# Altium PCB Modified_Dub_Siren.PcbDoc
Units mil, origin at the board's own origin, x right, y up, seen from the top; angles counter-clockwise.
Board outline 4500 x 2600 mil, 2 copper layers (Top Layer, Bottom Layer), stack 60.4 mil thick; 44 components, 29 nets, 132 pads, 0 vias.
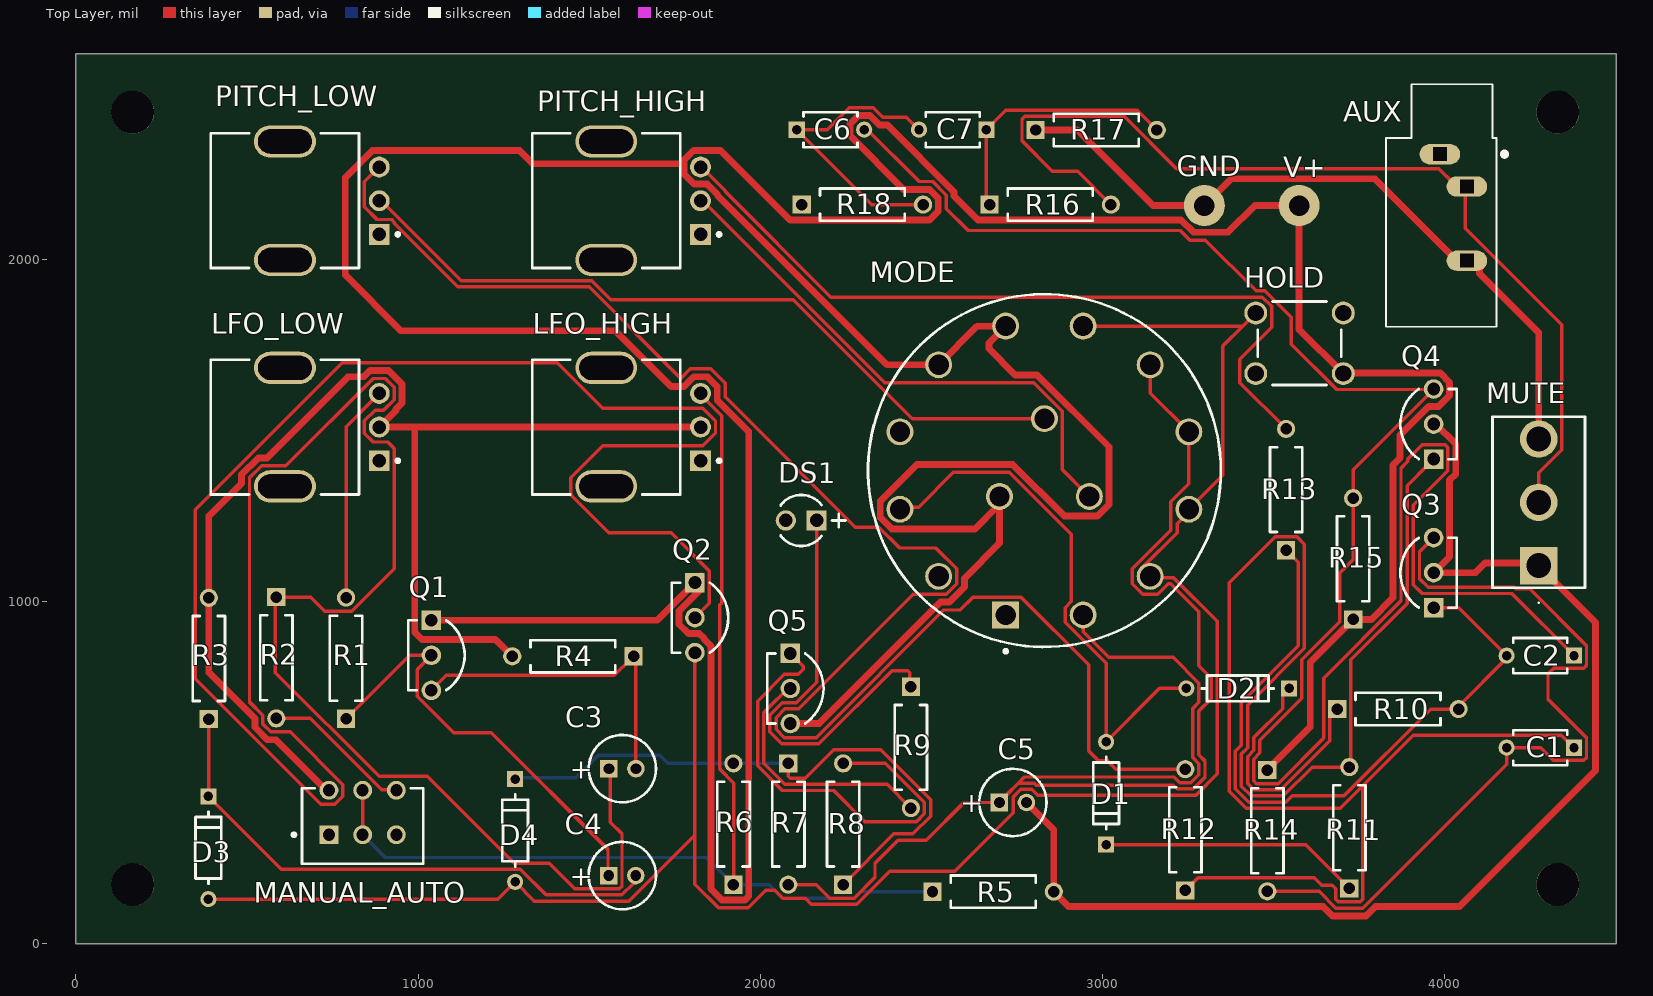
[diagram p0: Top Layer view]
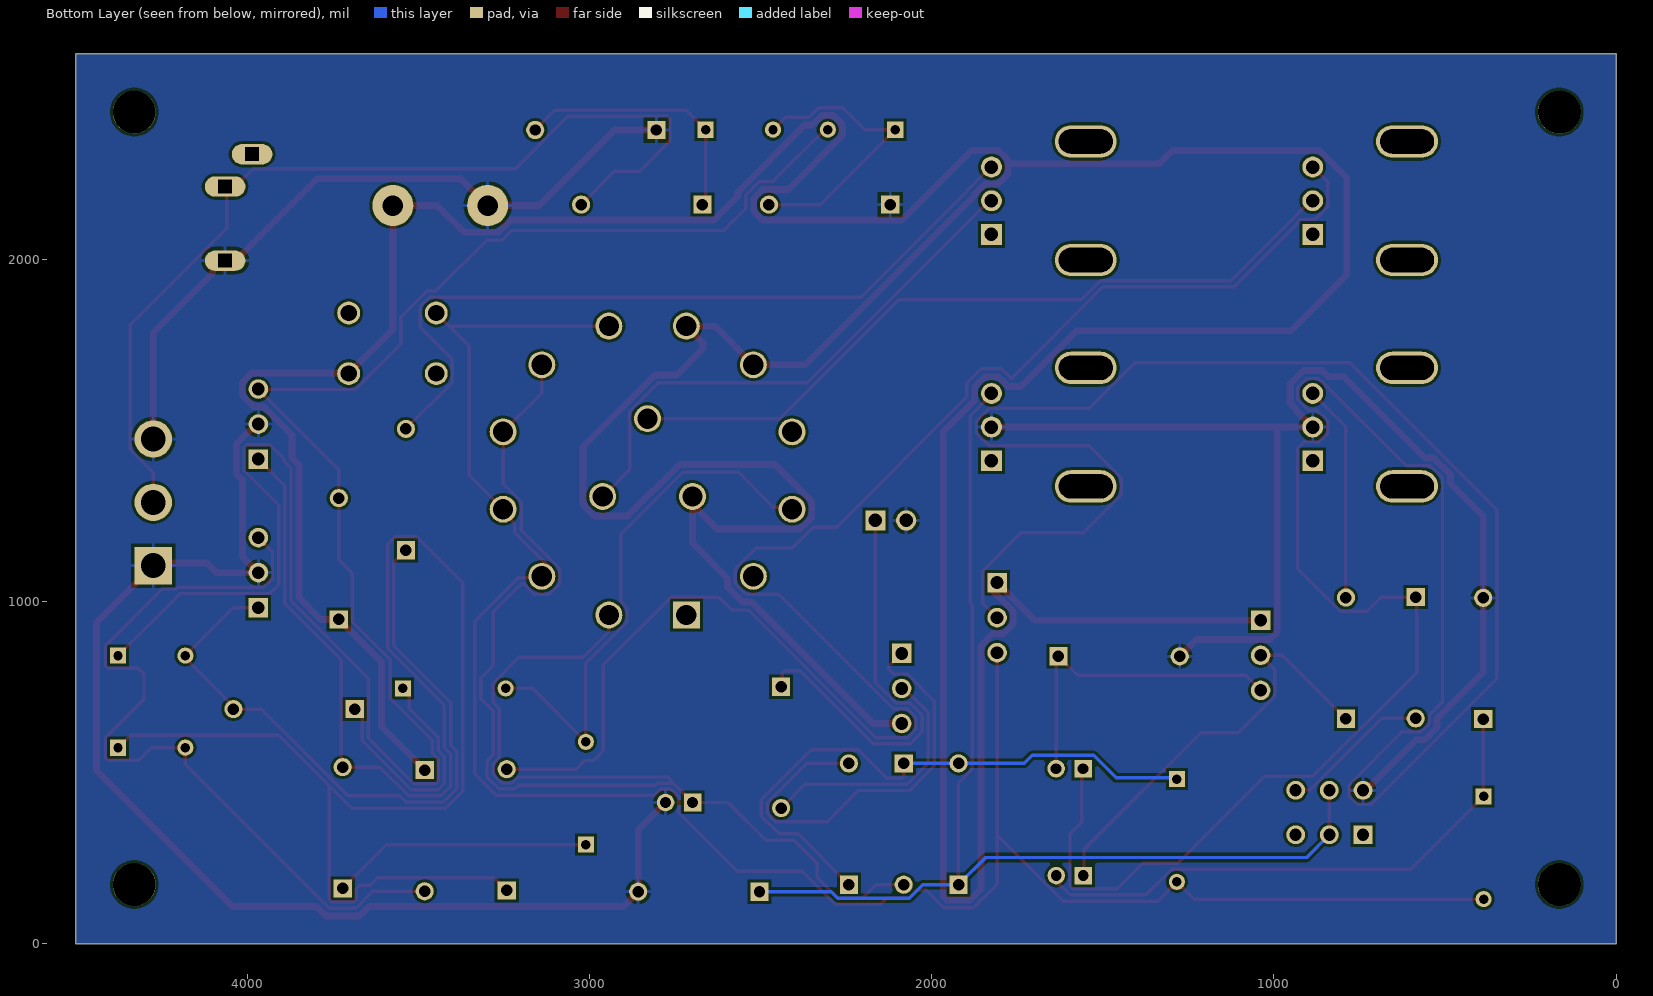
[diagram p1: Bottom Layer view, seen from below]

## Layer stack, top to bottom
Top Solder: solder mask 0.5, Solder Resist, Dk 3.3
Top Layer: signal copper 0.7
Dielectric1: core 59, FR-4, Dk 4.3
Bottom Layer: signal copper 0.7
Bottom Solder: solder mask 0.5, Solder Resist, Dk 3.3

## Board outline
0,0 4500,0 4500,2600 0,2600

## Design rules (kind name [scope] priority, off if disabled: settings)
Clearance [All] p1: gap=8 ignorepadtopadclearanceinfootprint=TRUE
DiffPairsRouting [All] p1: maxlimit=10 minlimit=10 mostfreqgap=10 toplayer_minwidth=10 toplayer_maxwidth=10 toplayer_prefwidth=10 bottomlayer_minwidth=10 bottomlayer_maxwidth=10 bottomlayer_prefwidth=10 maxuncoupledlength=500
HoleSize [All] p1: absolutevalues=TRUE maxlimit=300 minlimit=10 maxpercent=80.000 minpercent=20.000
MinimumAnnularRing [All] p1: minimumring=4
MinimumSolderMaskSliver [All] p1: minsoldermaskwidth=4
PasteMaskExpansion [All] p1: expansion=10
PlaneClearance [All] p1: clearance=15
PlaneConnect [All] p1: pad.planeconnectstyle=Relief pad.reliefexpansion=20 pad.reliefentries=4 pad.reliefconductorwidth=10 pad.reliefairgap=10 via.planeconnectstyle=Direct via.reliefexpansion=20 via.reliefentries=4 via.reliefconductorwidth=10 via.reliefairgap=10
PolygonConnect [All] p1: thpad.connectstyle=Relief thpad.reliefconductorwidth=10 thpad.reliefentries=4 thpad.polygonreliefangle="90 Angle" thpad.airgapwidth=10 smdpad.connectstyle=Relief smdpad.reliefconductorwidth=10 smdpad.reliefentries=4 smdpad.polygonreliefangle="90 Angle" smdpad.airgapwidth=10 via.connectstyle=Direct via.reliefconductorwidth=10 via.reliefentries=4 via.polygonreliefangle="90 Angle" via.airgapwidth=10
RoomDefinition Sheet1 [InComponentClass('Sheet1')] p1: confinementstyle=ConfineIn formatcopy=TRUE lockcomponents=FALSE outline 4545,-5 6251,-5 6251,680 4545,680
RoutingVias [All] p1: holewidth=10 width=20 viastyle="Through Hole" minholewidth=10 minwidth=20 maxholewidth=10 maxwidth=20
SMDNeckDown [All] p1: percent=100.000
SilkToSilkClearance [All] p1: silktosilkclearance=4
SilkToSolderMaskClearance SilkscreenOverComponentPads [IsPad] p1: minsilkscreentomaskgap=4 clearancetoexposedcopper=TRUE
SolderMaskExpansion [All] p1: expansion=10 istentingtop=FALSE
SupplyNets "Schematic Supply Nets_1" [InNet('V+')] p1: voltage=0.000
SupplyNets "Schematic Supply Nets" [InNet('GND')] p2: voltage=0.000
Width [All] p1: maxlimit=30 minlimit=10 preferedwidth=20
22 further rules are at their usual default settings.

## Components (designator, comment, footprint, x,y, rotation, side; value= is the part's Value field where it differs from the comment)
AUX "SJ1-3534" CUI_SJ1-3533 3985.29,2307.04 r270 top
C1 "10nF" FP-K15H5-MFG 4278.62,572.94 r180 top
C2 "10nF" FP-K15H5-MFG 4278.62,842.09 r180 top
C3 "ECA1HM100" CAPPR55-200-1100X500X1200 1596.63,511.73 r0 top value=10µF
C4 "ECA1HM100" CAPPR55-200-1100X500X1200 1596.31,199.3 r0 top value=10µF
C5 "ECA1HM100" CAPPR55-200-1100X500X1200 2737.65,412.84 r0 top value=100µF
C6 "100nF" FP-K15H5-MFG 2204.71,2378.66 r0 top
C7 "100nF" FP-K15H5-MFG 2561.71,2378.66 r180 top
D1 "1N4148" FP-017AG-MFG 3010,440 r90 top
D2 "1N4148" FP-017AG-MFG 3394.62,746.17 r180 top
D3 "1N4148" FP-017AG-MFG 387.04,280.57 r270 top
D4 "1N4148" FP-017AG-MFG 1283.15,331.24 r270 top
DS1 "3mm LED" LED-2P-2.28-3MM_A 2119.09,1236.84 r180 top
HOLD "SW3" BEST-TS-1109_V 3575.14,1754.57 r0 top
LFO_HIGH "PTV09A-4020F-B104" FP-PTV09A-4020-MFG 1549.49,1509.74 r90 top value=20kΩ
LFO_LOW "PTV09A-4020F-B104" FP-PTV09A-4020-MFG 610.72,1509.74 r90 top value=20kΩ
MANUAL_AUTO "JS202011CQN" FP-JS202011AQN-MFG 837.74,344.16 r0 top
MODE "SW2" CKCP-A30415RNZQ-15_V 2829.71,1382.77 r270 top
MUTE "X1" 100SP5T1B1M2QEH 4274.04,1104.83 r90 top
PITCH_HIGH "PTV09A-4020F-A104" FP-PTV09A-4020-MFG 1549.49,2171.14 r90 top value=20kΩ
PITCH_LOW "PTV09A-4020F-A104" FP-PTV09A-4020-MFG 610.72,2171.14 r90 top value=20kΩ
Q1 "2N3906" FP-135AR-MFG 1053.29,843 r0 top
Q2 "2N3906" FP-135AR-MFG 1823.56,952.92 r0 top
Q3 "2N3904" FP-135AR-MFG 3952.2,1084.31 r180 top
Q4 "2N3904" FP-135AR-MFG 3952.2,1518.55 r180 top
Q5 "2N3904" FP-135AR-MFG 2102.21,746.04 r0 top
R1 "MFR-25FBF52-10K" RESA60-630X240 789.18,834.55 r90 top value=10k
R2 "MFR-25FBF52-10K" RESA60-630X240 585.47,835.76 r270 top value=10k
R3 "MFR-25FBF52-1K" RESA60-630X240 388.1,833.65 r90 top value=1k
R4 "MFR-25FBF52-1K" RESA60-630X240 1452.03,839.98 r180 top value=1k
R5 "MFR-25FBF52-47K5" RESA60-630X240 2679.97,152.16 r0 top value=47.5k
R6 "MFR-25FBF52-2K21" RESA60-630X240 1921.08,349.87 r90 top value=2.21k
R7 "MFR-25FBF52-1K" RESA60-630X240 2081.34,349.87 r270 top value=1k
R8 "MFR-25FBF52-100K" RESA60-630X240 2241.59,349.87 r90 top value=100k
R9 "MFR-25FBF52-1K" RESA60-630X240 2439.55,573.73 r270 top value=1k
R10 "MFR-25FBF52-221K" RESA60-630X240 3862.76,685.88 r0 top value=221k
R11 "MFR-25FBF52-221K" RESA60-630X240 3720.66,339.11 r90 top value=221k
R12 "MFR-25FBF52-100K" RESA60-630X240 3241.35,332.99 r90 top value=100k
R13 "MFR-25FBF52-100K" RESA60-630X240 3535.84,1327.22 r90 top value=100k
R14 "MFR-25FBF52-4K75" RESA60-630X240 3481,330.55 r270 top value=4.75k
R15 "MFR-25FBF52-4K75" RESA60-630X240 3731.88,1124.96 r90 top value=4.75k
R16 "MFR-25FBF52-100K" RESA60-630X240 2846.77,2159.68 r0 top value=100k
R17 "MFR-25FBF52-22K1" RESA60-630X240 2980.98,2377.81 r0 top value=22k
R18 "MFR-25FBF52-22K1" RESA60-630X240 2297.92,2159.68 r0 top value=22k

## Footprints (in the part's own frame and the unit in brackets; to place one, negate y for a bottom-side part, rotate by r counter-clockwise, add the part's x,y. Pads: shape width x height; smd on the part's side, far side on the other; paste and mask are expansions set on the pad)
100SP5T1B1M2QEH [mm]
  rect 2.775x2.775 hole 1.85: 1(0,0)
  round 2.775 hole 1.85: 2(4.7,0) 3(9.4,0)
  silkscreen extent -2.8,-3.43 11.05,3.43
BEST-TS-1109_V [mm] "THD, 4-Leads, Body 6.2x6.2mm"
  round 1.7 hole 1.2: 1(-3.25,2.25) 2(3.25,2.25) 3(-3.25,-2.25) 4(3.25,-2.25)
  silkscreen extent -3.1,-3.1 3.1,3.1
CAPPR55-200-1100X500X1200 [mm] "THD, 2-Leads, Dia 5mm, Pin Spacing 2mm"
  rect 1.3x1.3 hole 0.8: 1(-1,0)
  round 1.3 hole 0.8: 2(1,0)
  silkscreen extent -2.5,-2.5 2.5,2.5, body extent -2.5,-2.5 2.45,2.5, height 12
CKCP-A30415RNZQ-15_V [mm] "Rotary Switch, A, 1-4, B, 5-8, C, 9-12 Terminals, Dia 26.19mm, Height 60.59mm"
  rect 2x2 hole 1.5: 1(10.722,-2.873)
  round 2 hole 1.5: 2(7.849,-7.849) 3(2.873,-10.722) 4(-2.873,-10.722) 5(-7.849,-7.849) 6(-10.722,-2.873) 7(-10.722,2.873) 8(-7.849,7.849) 9(-2.873,10.722) 10(2.873,10.722) 11(7.849,7.849) 12(10.722,2.873) A(1.925,-3.334) B(-3.85,0) C(1.925,3.334)
  silkscreen extent -13.09,-13.09 13.54,13.1, body extent -12.99,-13.07 13.09,13.07, height 60.58
CUI_SJ1-3533 [mm]
  oval 1.508x3.016 hole 1 square: 1(0,0) 2(2.4,2) 3(7.9,2)
  silkscreen extent -5.2,-4 12.8,4.97
FP-017AG-MFG [mm]
  rect 1.2x1.2 hole 0.7 paste-2539.97 mask+0: 1(-3.813,0)
  round 1.2 hole 0.7 paste-2539.97 mask+0: 2(3.813,0)
  silkscreen extent -2.68,-0.96 2.68,0.96, body extent -4.51,-1.05 4.51,1.05, height 0.25
FP-135AR-MFG [mm]
  rect 1.45x1.45 hole 0.95 paste-2539.97 mask+0: 1(-0.38,2.6)
  round 1.45 hole 0.95 paste-2539.97 mask+0: 2(-0.38,0) 3(-0.38,-2.6)
  silkscreen extent -2.1,-2.6 2.09,2.6, body extent -2.19,-3.42 2.19,3.42, height 0.25
FP-JS202011AQN-MFG [mm]
  rect 1.4x1.4 hole 0.9 paste-2539.97 mask+0: 1(-2.5,-0.65)
  round 1.4 hole 0.9 paste-2539.97 mask+0: 2(0,-0.65) 3(2.5,-0.65) 4(-2.5,2.65) 5(0,2.65) 6(2.5,2.65)
  silkscreen extent -5.22,-2.8 4.5,2.8, body extent -4.6,-2.9 4.6,3.45, height 0.25
FP-K15H5-MFG [mm]
  rect 1.2x1.2 hole 0.7 paste-2539.97 mask+0: 1(-2.5,0)
  round 1.2 hole 0.7 paste-2539.97 mask+0: 2(2.5,0)
  silkscreen extent -2,-1.3 2,1.3, body extent -3.2,-1.4 3.2,1.4, height 0.25
FP-PTV09A-4020-MFG [mm]
  rect 1.55x1.55 hole 1 paste-2539.97 mask+0: 1(-2.5,-7)
  round 1.55 hole 1 paste-2539.97 mask+0: 2(0,-7) 3(2.5,-7)
  rrect100% 2.4x4.6 hole 4 slot 1.8 at 0 deg paste-2539.97 mask+0: 4(-4.4,0) 5(4.4,0)
  silkscreen extent -5,-8.5 5,5.5, body extent -5.8,-7.88 5.8,5.6, height 0.25
LED-2P-2.28-3MM_A [mm] "LED, 2-Leads, Dia 3mm, Pitch 2.28mm"
  rect 1.5x1.5 hole 1: 1(-1.14,0)
  round 1.5 hole 1: 2(1.14,0)
  silkscreen extent -3.29,-1.9 1.52,1.9, body extent -1.9,-1.91 1.52,1.91, height 5.3
RESA60-630X240 [mm] "Axial Resistor, 2-Leads, Dia 2.4mm, Body Length 6.3mm"
  rect 1.35x1.35 hole 0.85: 1(-4.5,0)
  round 1.35 hole 0.85: 2(4.5,0)
  silkscreen extent -3.15,-1.2 3.15,1.2, body extent -4.77,-1.19 4.77,1.2, height 2.4

## Part data
AUX: "3.5 mm Right-Angle Stereo Jack, 4 Pin PCB Mount, Threaded w/ Nut", Package=None, Check_prices=https://www.snapeda.com/parts/SJ1-3534/Same+Sky/view-part/?ref=eda, MF="Same Sky", MP=SJ1-3534, SnapEDA_Link=https://www.snapeda.com/parts/SJ1-3534/Same+Sky/view-part/?ref=snap
C1 C2: library part CMP-02417-000048-1, "CAP CER 0.1UF 50V X7R RADIAL", Capacitance=100nF, Case/Package=Dipped, Dielectric=X7R, Max Operating Temperature=125°C, Min Operating Temperature=-55°C, Package Quantity=5000, Tolerance=10%, Voltage=50V, Construction=RADIAL, Depth=2.5mm, Diameter=500um, Height=4mm, Height - Seated (Max)=0.1inch, Lead Diameter=0.5mm, Lead Length=30mm, Lead Pitch=5mm, Lead/Base Style="Formed Leads", Length=4mm, Mount="Through Hole", Packaging=Bulk, Radiation Hardening=No, RoHS Compliant=Yes, Series=K, Termination=Radial, Thickness=2.6mm, Voltage Rating=50V, Voltage Rating (DC)=50V, Weight=0.005644oz, Width=2.5mm
C3 C4 C5: library part CMP-001-00025-7, "Aluminum Electrolytic Capacitor, 10 uF, +/- 20%, 50 V, -40 to 85 degC, 2-Pin THD, RoHS, Bulk", Capacitor Type=Electrolytic, Case/Package=Radial, Manufacturer=Panasonic, Max Operating Temperature=85°C, Min Operating Temperature=-40°C, Package Description="2-Pin Radial Lead, Dia 5 mm, Height 12 mm", Package Quantity=200, Package Reference=CAPPR55-200-1100X500X1200, Ripple Current=65mA, Tolerance=20%, Voltage Rating=50V, Datasheet URL=https://industrial.panasonic.com/cdbs/www-data/pdf/RDF0000/ABA0000C1218.pdf, Datasheet Version="Rev. 05, 10/2016", Diameter=5mm, Lead Pitch=2mm, Manufacturer URL=http://www.panasonic.com/, Mounting Technology=TH, Packaging=Bulk, Pins=2, Ripple Current (AC)=65mA, RoHS Compliant=True
C6 C7: library part CMP-02417-000048-1, "CAP CER 0.1UF 50V X7R RADIAL", Case/Package=Dipped, Dielectric=X7R, Max Operating Temperature=125°C, Min Operating Temperature=-55°C, Package Quantity=5000, Tolerance=10%, Voltage=50V, Capacitance=100nF, Construction=RADIAL, Depth=2.5mm, Diameter=500um, Height=4mm, Height - Seated (Max)=0.1inch, Lead Diameter=0.5mm, Lead Length=30mm, Lead Pitch=5mm, Lead/Base Style="Formed Leads", Length=4mm, Mount="Through Hole", Packaging=Bulk, Radiation Hardening=No, RoHS Compliant=Yes, Series=K, Termination=Radial, Thickness=2.6mm, Voltage Rating=50V, Voltage Rating (DC)=50V, Weight=0.005644oz, Width=2.5mm
D1 D2 D3 D4: library part CMP-07163-000046-1, "DIODE GEN PURP 100V 200MA DO35", Average Rectified Current=200mA, Capacitance=4pF, Case/Package=DO-35, Current=4A, Forward Current=300mA, Forward Voltage=1V, Max Forward Surge Current (Ifsm)=1A, Max Operating Temperature=175°C, Max Power Dissipation=500mW, Max Repetitive Reverse Voltage (Vrrm)=100V, Max Reverse Current=5uA, Min Operating Temperature=-65°C, Package Quantity=2000, Contact Plating=Tin, Current Rating=200mA, Diameter=1.91mm, Element Configuration=Single, Height=4.56mm, Lead Free="Lead Free", Length=4.56mm, Max Reverse Voltage (DC)=100V, Max Surge Current=4A, Mount="Through Hole", Number of Pins=2, Output Current=200mA, Outside Diameter=1.85mm, Packaging=Bulk, Peak Non-Repetitive Surge Current=4A, Polarity=Standard, Power Dissipation=500mW, Radiation Hardening=No, REACH SVHC="No SVHC", Recovery Time=4ns, Reverse Recovery Time=4ns, Reverse Voltage=100V, Series=-, Voltage=100V, Voltage Rating (DC)=100V, Weight=0.01lb, Width=1.91mm
DS1: library part CMP-007-00007-2, "Red LED, 80 mW, 30 mA, -25 to 85 degC, 2-Pin THD", Case/Package=304090041, Manufacturer="Shenzhen CGX", Package Description="2-Pin Through Hole Device, Dia 3 mm, Pitch 2.28 mm", Datasheet URL=http://datasheet.octopart.com/304090041-Chengguangxing-datasheet-62330656.pdf, Datasheet Version=Sep-14, Manufacturer URL=http://szcgx.com/, Mounting Technology=TH, Package Reference=304090041, RoHS Compliant=Unknown
HOLD: library part CMP-011-00002-2, "Tactile Switch, SPST, 12 V, 50 mA, -20 to 80 degC, 4-Pin THD", Case/Package=TS-1109, Manufacturer="Shenzhen Best", Package Description="4-Pin Through Hole Device, Body 6.2 x 6.2 mm", Datasheet URL=http://datasheet.octopart.com/TS-1109-Best-Inc.-datasheet-30458100.pdf, Datasheet Version=Dec-12, Manufacturer URL=www.best-dz.com/, Mounting Technology=TH, Package Reference=TS-1109, RoHS Compliant=Unknown
LFO_HIGH LFO_LOW PITCH_HIGH PITCH_LOW: library part CMP-07234-000017-1, "POT 20K OHM 1/20W CARBON LOG", Manufacturer="Bourns Inc.", Manufacturer Part Number=PTV09A-4020F-A203, Package=PTV09A-4020, Power Rating=0.05W, Resistance=20kΩ, Temperature="-10°C to +50°C", Temperature Range High=+50°C, Temperature Range Low=-10°C, Tolerance=20%, Voltage Rating=50V, Automotive=No, Category=Res, ComponentLink2Description=Datasheet, ComponentLink2URL=https://www.bourns.com/docs/product-datasheets/ptv09.pdf?sfvrsn=5e1089f1_12, Composition=Carbon, Device Class L1="Passive Components", Device Class L2=Resistors, Device Class L3="Variable Resistors and Potentiometers", Digikey Description="POT 20K OHM 1/20W CARBON LOG", Height=20.5mm, Lead Free=Yes, Mouser Description="Potentiometers 20K AUDIO 20%", Octopart=https://octopart.com/ptv09a-4020f-a203-bourns-1637636, RoHS=TRUE, Series=PTV09
MANUAL_AUTO: library part CMP-10038-000021-1, "SWITCH SLIDE DPDT 300MA 6V", Actuator Color=Black, Contact Current Rating=300mA, Contact Resistance=70mR, Max Operating Temperature=85°C, Max Voltage Rating (DC)=6V, Min Operating Temperature=-40°C, Package Quantity=1, Actuator Length=2mm, Actuator Material=Nylon, Actuator Type=Standard, Contact Material="Copper Alloy", Contact Plating=Silver, Current Rating=300mA, Depth=5.6mm, Electrical Life=5000Cycles, Housing Material=Nylon, Illumination Type=Non-Illuminated, Length=9mm, Max Current Rating=300mA, Mount="Through Hole", Orientation="Right Angle", Packaging=Bulk, Radiation Hardening=No, REACH SVHC="No SVHC", RoHS Compliant=Yes, Series=JS, Switch Function=On-On, Switch Travel=2mm, Termination="PC Pins", Throw Configuration=DPDT, Voltage Rating (DC)=6V
MODE: library part CMP-1076-00011-1, "A Series Rotary Switch, 3 Poles, 4 Positions, 30 deg Angle of Throw, -30 to 85 degC, RoHS", Manufacturer="C&K Components", PartNumber=A30415RNZQE, Temperature Range="-30 to 85 degC", Angle of Throw="30 deg", ComponentLink1Description="Manufacturer URL", ComponentLink1URL=http://www.ck-components.com/, ComponentLink2Description=Datasheet, ComponentLink2URL=http://www.ck-components.com/13397/arotary_9apr14.pdf/, ComponentLink3Description="Package Specification", ComponentLink3URL=http://www.ck-components.com/13397/arotary_9apr14.pdf/, DatasheetVersion=41821, Mounting Technology="Through Hole", PackageDescription="15-Pin Through Hole Device, Dia 26.19 mm, Height 60.59 mm", PackageReference=A30415RNZQ-15, Pole=3, Position=4, RoHS=TRUE, Series=A
MUTE: library part 100SP5T1B1M2QEH, "TOGGLE, 5A, 120VAC/28VDC SPDT, On-Off-(On) Panel Mount, Through Hole", Manufacturer_Name=E-Switch, Mouser Part Number=612-100-E1121, Datasheet Link=https://configured-product-images.s3.amazonaws.com/2D/specs/100SP5T1B1M2QEH.pdf, Geometry.Height=28.44mm, Manufacturer_Part_Number=100SP5T1B1M2QEH, Mouser Price/Stock=https://www.mouser.co.uk/ProductDetail/E-Switch/100SP5T1B1M2QEH?qs=7Bi7Dg8SEnz4%252B%252BHvW9Rm0A%3D%3D
Q1 Q2: library part CMP-00278-84408866-1, "2N3906TF Small Signal Bipolar Transistor, 0.2A I(C), 40V V(BR)CEO, 1-Element, PNP, Silicon, TO-92", Case/Package=TO-92, Collector Base Voltage (VCBO)=-40V, Collector Emitter Saturation Voltage=-400mV, Current Rating=-200mA, Emitter Base Voltage (VEBO)=-5V, Frequency=250MHz, Manufacturer Lifecycle Status=ACTIVE, Max Breakdown Voltage=160V, Max Junction Temperature (Tj)=150°C, Max Power Dissipation=625mW, Min Operating Temperature=-55°C, Collector Emitter Breakdown Voltage=-40V, Collector Emitter Voltage (VCEO)=-40V, Element Configuration=Single, Gain Bandwidth Product=250MHz, Height=5.33mm, hFE Min=100, Lead Free="Lead Free", Length=5.2mm, Lifecycle Status=Production, Max Collector Current=-200mA, Max Frequency=250MHz, Max Operating Temperature=150°C, Mount="Through Hole", NexarPartId=84408866, Number of Elements=1, Number of Pins=3, Packaging="Tape and Reel", Polarity=PNP, Power Dissipation=625mW, Radiation Hardening=No, REACH SVHC="No SVHC", RoHS=Compliant, Schedule B=8541210080, Transition Frequency=250MHz, Voltage Rating (DC)=-40V, Weight=240mg, Width=4.19mm
Q3 Q4 Q5: library part CMP-00278-84329632-1, "KSP10TA Transistor, bjt, npn, 25V V(Br)Ceo, to-92 Rohs Compliant: Yes", Case/Package=TO-92-3, Collector Base Voltage (VCBO)=30V, Collector Emitter Breakdown Voltage=25V, Collector Emitter Saturation Voltage=500mV, Current Rating=100mA, Emitter Base Voltage (VEBO)=3V, Frequency=650MHz, Manufacturer Lifecycle Status=ACTIVE, Max Collector Current=4mA, Max Frequency=100MHz, Max Junction Temperature (Tj)=150°C, Max Power Dissipation=350mW, Min Operating Temperature=-55°C, Collector Emitter Voltage (VCEO)=25V, Element Configuration=Single, Gain Bandwidth Product=650MHz, Height=8.77mm, hFE Min=60, Lead Free="Lead Free", Length=4.58mm, Lifecycle Status=Production, Max Breakdown Voltage=25V, Max Operating Temperature=150°C, Mount="Through Hole", NexarPartId=84329632, Number of Elements=1, Number of Pins=3, Polarity=NPN, Power Dissipation=350mW, Radiation Hardening=No, RoHS=Compliant, Transition Frequency=650MHz, Voltage Rating (DC)=25V, Weight=240mg, Width=3.86mm
R1 R2: library part CMP-009-00047-4, "Axial Resistor, 10 KOhm, +/- 1%, 0.25 W, -55 to 155 degC, 2-Pin THD, RoHS, Bulk", Case/Package=Axial, Manufacturer=Yageo, Max Operating Temperature=155°C, Min Operating Temperature=-55°C, Package Description="2-Pin Axial Lead, Dia 2.4 mm, Body Length 6.3 mm", Package Quantity=200, Package Reference=MFR-25, Power=250mW, Tolerance=1%, Voltage Rating=250V, Datasheet URL=http://www.yageo.com/documents/recent/Yageo%20LR_MFR_2013.pdf, Datasheet Version=Apr-13, Manufacturer URL=http://www.yageo.com/, Mounting Technology=TH, Packaging=Bulk, RoHS Compliant=True
R3 R4 R7 R9: library part CMP-009-00048-4, "Axial Resistor, 1 KOhm, +/- 1%, 250 mW, -55 to 155 degC, 2-Pin THD, RoHS, Bulk", Case/Package=Axial, Manufacturer=Yageo, Max Operating Temperature=155°C, Min Operating Temperature=-55°C, Package Description="2-Pin Axial Lead, Dia 2.4 mm, Body Length 6.3 mm", Package Quantity=200, Package Reference=MFR-25, Power=250mW, Tolerance=1%, Voltage Rating=250V, Composition=CarbonFilm, Datasheet URL=http://www.yageo.com/documents/recent/Yageo%20LR_MFR_2013.pdf, Datasheet Version=Apr-13, Manufacturer URL=http://www.yageo.com/, Mounting Technology=TH, Packaging=Bulk, RoHS Compliant=True
R5: library part CMP-009-00057-4, "Axial Resistor, 47.5 KOhm, +/- 1%, 0.25 W, -55 to 155 degC, 2-Pin THD, RoHS, Bulk", Case/Package=Axial, Manufacturer=Yageo, Max Operating Temperature=155°C, Min Operating Temperature=-55°C, Package Description="2-Pin Axial Lead, Dia 2.4 mm, Body Length 6.3 mm", Package Quantity=200, Package Reference=MFR-25, Power=250mW, Tolerance=1%, Voltage Rating=250V, Datasheet URL=http://www.yageo.com/documents/recent/Yageo%20LR_MFR_2013.pdf, Datasheet Version=Apr-13, Manufacturer URL=http://www.yageo.com/, Mounting Technology=TH, Packaging=Bulk, RoHS Compliant=True
R6: library part CMP-009-00054-4, "Axial Resistor, 2.21 KOhm, +/- 1%, 0.25 W, -55 to 155 degC, 2-Pin THD, RoHS, Bulk", Case/Package=Axial, Manufacturer=Yageo, Max Operating Temperature=155°C, Min Operating Temperature=-55°C, Package Description="2-Pin Axial Lead, Dia 2.4 mm, Body Length 6.3 mm", Package Quantity=200, Package Reference=MFR-25, Power=250mW, Tolerance=1%, Voltage Rating=250V, Datasheet URL=http://www.yageo.com/documents/recent/Yageo%20LR_MFR_2013.pdf, Datasheet Version=Apr-13, Manufacturer URL=http://www.yageo.com/, Mounting Technology=TH, Packaging=Bulk, RoHS Compliant=True
R8 R12 R13 R16: library part CMP-009-00045-4, "Axial Resistor, 100 KOhm, +/- 1%, 0.25 W, -55 to 155 degC, 2-Pin THD, RoHS, Bulk", Case/Package=Axial, Manufacturer=Yageo, Max Operating Temperature=155°C, Min Operating Temperature=-55°C, Package Description="2-Pin Axial Lead, Dia 2.4 mm, Body Length 6.3 mm", Package Quantity=200, Package Reference=MFR-25, Power=250mW, Tolerance=1%, Voltage Rating=250V, Datasheet URL=http://www.yageo.com/documents/recent/Yageo%20LR_MFR_2013.pdf, Datasheet Version=Apr-13, Manufacturer URL=http://www.yageo.com/, Mounting Technology=TH, Packaging=Bulk, RoHS Compliant=True
R10 R11: library part CMP-009-00050-4, "Axial Resistor, 221 KOhm, +/- 1%, 0.25 W, -55 to 155 degC, 2-Pin THD, RoHS, Bulk", Case/Package=Axial, Manufacturer=Yageo, Max Operating Temperature=155°C, Min Operating Temperature=-55°C, Package Description="2-Pin Axial Lead, Dia 2.4 mm, Body Length 6.3 mm", Package Quantity=200, Package Reference=MFR-25, Power=250mW, Tolerance=1%, Voltage Rating=250V, Datasheet URL=http://www.yageo.com/documents/recent/Yageo%20LR_MFR_2013.pdf, Datasheet Version=Apr-13, Manufacturer URL=http://www.yageo.com/, Mounting Technology=TH, Packaging=Bulk, RoHS Compliant=True
R14 R15: library part CMP-009-00059-4, "Axial Resistor, 4.75 KOhm, +/- 1%, 0.25 W, -55 to 155 degC, 2-Pin THD, RoHS, Bulk", Case/Package=Axial, Manufacturer=Yageo, Max Operating Temperature=155°C, Min Operating Temperature=-55°C, Package Description="2-Pin Axial Lead, Dia 2.4 mm, Body Length 6.3 mm", Package Quantity=200, Package Reference=MFR-25, Power=250mW, Tolerance=1%, Voltage Rating=250V, Composition=MetalFilm, Datasheet URL=http://www.yageo.com/documents/recent/Yageo%20LR_MFR_2013.pdf, Datasheet Version=Apr-13, Manufacturer URL=http://www.yageo.com/, Mounting Technology=TH, Packaging=Bulk, RoHS Compliant=True
R17 R18: library part CMP-009-00052-4, "Axial Resistor, 22.1 KOhm, +/- 1%, 0.25 W, -55 to 155 degC, 2-Pin THD, RoHS, Bulk", Case/Package=Axial, Manufacturer=Yageo, Max Operating Temperature=155°C, Min Operating Temperature=-55°C, Package Description="2-Pin Axial Lead, Dia 2.4 mm, Body Length 6.3 mm", Package Quantity=200, Package Reference=MFR-25, Power=250mW, Tolerance=1%, Voltage Rating=250V, Datasheet URL=http://www.yageo.com/documents/recent/Yageo%20LR_MFR_2013.pdf, Datasheet Version=Apr-13, Manufacturer URL=http://www.yageo.com/, Mounting Technology=TH, Packaging=Bulk, RoHS Compliant=True

## Free pads (board coordinates)
  round 120 hole 60: 11(3296.95,2157.13) 12(3574.01,2157.13)
  round 125 hole 125: 13(165.63,173.2) 13(165.63,2430.03) 13(4329.55,173.2) 13(4329.55,2430.03)

## Nets (pads, with @x,y where several pads share a name; then routed paths per layer and width w, separated by ;. In a path a pad name is that pad's centre, name@x,y a point inside that pad or via, vN(x,y) a via of type N, cw(c..) or ccw(c..) an arc to the next point about the centre after c; other vN are vias at no path point)
GND: AUX.3 C5.2 DS1.2 LFO_HIGH.2 LFO_LOW.2 MANUAL_AUTO.4 MUTE.1 MUTE.3 pad.11 Q3.2 Q4.2 R3.2 R4.2 R5.2 R17.1 R18.1 | length 9352.7
  Top Layer w20: R3.2@383.94,1006.65 388.1,1002.5 388.1,792.93 522.9,658.13 522.9,632.67 559.56,596.02 585.01,596.02 732.54,448.49 MANUAL_AUTO.4 ; R3.2 388.1,1249.46 484.17,1345.53 484.17,1370.99 532.93,1419.75 558.39,1419.75 795.31,1656.67 840.76,1656.67 858.76,1674.67 913.86,1674.67 952.82,1635.71 952.82,1580.61 934.82,1562.61 934.82,1558.25 LFO_LOW.2@892.39,1515.81 ; LFO_LOW.2 892.39,1509.74 989.92,1509.74 1812.31,1509.74 LFO_HIGH.2@1822.1,1519.52 ; 989.92,1502.15 989.92,911.23 1011.61,889.54 1225.31,889.54 R4.2 ; C5.2 2857.13,332.73 2857.13,163.98 R5.2@2855.81,162.66 ; R17.1@2805.43,2379.5 2807.13,2377.81 2926.52,2377.81 3147.2,2157.13 pad.11 3374.95,2235.13 3795.24,2235.13 4036.55,1993.81 AUX.3@4084.11,1993.81 ; R5.2@2861.03,153.98 2861.03,148.27 2900.49,108.81 3644.28,108.81 3671.72,81.37 3769.6,81.37 3797.05,108.81 4042.64,108.81 4440.26,506.42 4440.26,938.6 MUTE.1 ; Q3.2 3976.72,1084.31 4088.97,1084.31 4117.64,1112.99 MUTE.1@4274.04,1112.99 ; Q4.2 3972.79,1518.55 4031.7,1459.64 4031.7,1372.73 4013.7,1354.73 4013.7,1130.85 Q3.2@3976.72,1093.87 ; AUX.3@4083.06,1996.02 4101.25,1977.83 4101.25,1958.8 4274.04,1786.01 4274.04,1492.29 MUTE.3@4270,1488.25
NetAUX_2: AUX.2 MUTE.2 R16.2 | length 2846.5
  Top Layer w10: R16.2 2926.72,2256.89 2853.2,2256.89 2764.24,2345.85 2764.24,2409.77 2771.86,2417.38 3062.61,2417.38 3215.63,2264.36 3982.55,2264.36 4025.5,2221.41 AUX.2@4045.89,2221.41 ; AUX.2@4059.79,2224.88 4059.79,2090.32 4341.67,1808.44 4341.67,1443.63 4274.04,1376.01 MUTE.2
NetC1_1: C1.1 Q4.1 R11.2 R12.1 | length 5090.7
  Top Layer w10: R12.1 3278.48,192.96 3618.11,192.96 3639.69,171.38 3670.54,171.38 3681.09,160.84 3681.09,129.98 3688.7,122.37 3752.62,122.37 3760.24,129.98 3760.24,461.78 ; Q4.1@3952.07,1423.97 3952.07,1401.1 3889.61,1338.64 3889.61,994.28 3725.17,829.84 R11.2@3725.17,520.78 ; C1.1@4372.1,577.89 4340.43,609.56 3908.02,609.56 3760.24,461.78 ; R11.2 R11.2@3725.17,520.78 ; R11.2 3612.01,516.27 3527.88,432.14 3434.13,432.14 3405.43,460.84 3405.43,554.58 3423.43,572.58 3423.43,697.07 3589.56,863.2 3589.56,1167.88 3567.8,1189.63 3503.88,1189.63 3369.43,1055.18 3369.43,445.93 3419.22,396.14 3694.59,396.14 3760.24,461.78 ; R11.2 R11.2@3725.17,520.78
NetC1_2: C1.2 Q3.3 R14.2 | length 2372.2
  Top Layer w10: R14.2 3632.23,153.38 3681.25,104.37 3760.08,104.37 4180.2,524.49 C1.2 4279.86,572.94 4316.48,536.32 4406.06,536.32 4413.67,543.93 4413.67,601.95 4301.18,714.43 4301.18,788.21 4318.44,805.47 4406.06,805.47 4413.67,813.08 4413.67,871.1 4247.57,1037.2 4207.4,1037.2 4203.11,1041.49 3951.23,1041.49 3925.61,1067.1 3925.61,1145.13 Q3.3@3967.71,1187.22
NetC2_1: C2.1 C6.2 Q4.3 R15.2 | length 5720.8
  Top Layer w10: C6.2 2312.08,2378.66 2463.48,2227.26 2503.08,2227.26 2542.66,2187.67 2542.66,2148.08 2606.61,2084.13 3227.12,2084.13 3255.12,2056.13 3299.93,2056.13 3448.43,1907.62 3473.89,1907.62 3551.01,1830.5 3551.01,1752.36 3683.85,1619.52 3962.5,1619.52 3962.5,1616.25 3731.88,1385.63 R15.2 3731.88,1122.93 3692.31,1083.35 3692.31,940.75 3607.56,856 3607.56,855.74 3581.36,829.55 3581.36,717.16 3459.43,595.23 3459.43,557.67 3441.43,539.67 3441.43,475.75 3449.05,468.14 3512.96,468.14 3646.02,601.19 3646.02,776.14 3871.61,1001.74 3871.61,1389.1 3891.9,1409.39 3891.9,1416.4 3933.23,1457.73 4001.09,1457.73 4008.7,1450.11 4008.7,1382.26 3907.61,1281.17 3907.61,1049.1 3933.23,1023.49 4195.65,1023.49 C2.1@4379.46,839.68
NetC2_2: C2.2 Q3.1 R10.2 R13.1 | length 2055.5
  Top Layer w10: R13.1 3571.56,1114.34 3571.56,870.65 3405.43,704.53 3405.43,580.04 3387.43,562.04 3387.43,453.38 3426.68,414.14 3535.33,414.14 3553.33,432.14 3705.13,432.14 3958.88,685.88 4035.74,685.88 R10.2@4038.94,689.08 ; Q3.1 4040.34,981.95 4170.28,852.01 C2.2@4170.28,837.11 ; R10.2 4039.93,693.85 4179.66,833.58 4179.66,841.55 C2.2
NetC3_1: C3.1 Q2.2 R2.1 | length 8604.3
  Top Layer w10: R2.1@582.88,1012.92 582.88,792.15 885.98,489.05 1027.01,489.05 1280.32,235.74 1382.32,235.74 1457.35,160.71 1587.92,160.71 1595.53,168.33 1595.53,320.89 1561.35,355.07 1561.35,507.63 C3.1 ; R2.1 685.92,1012.92 726.71,972.14 805.58,972.14 929.82,1096.38 929.82,1447.21 910.8,1466.22 868.29,1466.22 842.8,1491.71 842.8,1527.76 873.99,1558.95 898.63,1558.95 929.82,1590.14 929.82,1626.18 904.33,1651.67 868.29,1651.67 613.36,1396.75 542.46,1396.75 507.17,1361.46 507.17,706.39 545.9,667.66 545.9,642.2 569.08,619.02 626.14,619.02 779.87,465.29 779.87,431.69 756.11,407.93 715.11,407.93 348.52,774.52 348.52,1267.87 778.32,1697.67 1406.28,1697.67 1539.3,1564.65 1831.71,1564.65 1868.6,1527.76 1868.6,1491.71 1831.71,1454.82 1539.3,1454.82 1445.94,1361.46 1445.94,1311.55 1557.12,1200.38 1738.97,1200.38 1850.14,1089.21 1850.14,994.46 1818.73,963.05 Q2.2@1808.19,963.05
NetC3_2: C3.2 Q1.3 R4.1 | length 955.9
  Top Layer w10: Q1.3 1081.72,784.02 1573.24,784.02 1622.31,833.09 R4.1@1622.31,833.27 ; R4.1@1624.04,840.22 1636,828.27 C3.2
NetC4_1: C4.1 Q1.2 R1.1 | length 1280.8
  Top Layer w10: R1.1 974.8,842.99 Q1.2 996.79,801.45 996.79,723.43 1103.32,616.89 1213.24,616.89 1554.55,275.58 C4.1@1554.55,200.88
NetC4_2: C4.2 D3.1 R3.1 | length 1637.7
  Top Layer w10: D3.1 600,217.74 1298.32,217.74 1373.35,142.71 1595.37,142.71 1627.8,175.14 1627.8,194.6 C4.2@1640.75,207.55 ; D3.1@388.1,430.07 R3.1
NetC5_1: C5.1 MODE.8 MODE.9 MODE.12 R7.2 | length 4235.5
  Top Layer w10: R7.2@2081.55,180.02 2088.86,172.7 2163.5,172.7 2203.07,133.13 2273.55,133.13 2334.7,194.28 2334.7,235.75 2401.94,302.99 2484.89,302.99 2594.74,412.84 2694.7,412.84 2696.49,411.05 2718.87,433.43 2718.87,434.72 2753.58,469.43 ; MODE.12 2942.82,912.05 3018.17,836.69 3205.77,836.69 3281.12,761.33 3281.12,705.54 3263.12,687.54 3263.12,544.35 3280.92,526.55 3280.92,493.76 3257.74,470.58 3224.96,470.58 3208.1,487.43 2771.58,487.43 2753.58,469.43 ; MODE.8 3138.72,1608.98 MODE.9@3250.77,1496.94 ; MODE.9 3251.83,1343.73 3199.46,1291.36 3199.46,1208.56 3086.35,1095.45 3086.35,1052.07 3117.03,1021.39 3160.41,1021.39 3191.03,1052.01 3199.46,1052.01 3281.12,970.34 3281.12,812.25 3317.12,776.25 3317.12,716.08 3281.12,680.08 3281.12,551.8 3298.92,534.01 3298.92,486.31 3265.2,452.58 3217.5,452.58 3206.38,463.7 2806.19,463.7 2800.46,469.43 2753.58,469.43
NetC6_1: C6.1 C7.2 R18.2 | length 861.8
  Top Layer w10: C7.2@2458.96,2382.98 2426.66,2415.28 2357.91,2415.28 2329.91,2443.28 2259.72,2443.28 2195.1,2378.66 C6.1 2325.26,2159.68 2469.21,2159.68 R18.2@2471.86,2162.34
NetC7_1: C7.1 R16.1 R17.2 | length 767.1
  Top Layer w10: R16.1@2657.76,2162.34 2660.14,2164.72 C7.1 2716.87,2435.38 3100.57,2435.38 3156.13,2379.82 R17.2@3163.4,2379.82
NetD1_1: D1.1 R11.1 | length 763.3
  Top Layer w10: D1.1 3592.72,289.88 3714.73,167.87 R11.1@3722.74,167.87
NetD1_2: D1.2 D2.2 MODE.3 | length 1580.8
  Top Layer w10: MODE.3 2413.36,1275.43 2461.96,1275.43 2563.89,1377.35 2727.59,1377.35 2908.45,1196.5 2908.45,1000.35 2890.45,982.35 2890.45,938.96 3010,819.41 3010,597.04 D1.2@3006.54,593.58 ; D1.2 3166.05,746.16 3241.95,746.16 D2.2@3243.75,744.37
NetD2_1: D2.1 R10.1 | length 748.9
  Top Layer w10: D2.1 3526.12,727.54 3526.12,687.37 3441.43,602.68 3441.43,565.13 3423.43,547.13 3423.43,468.3 3441.59,450.14 3520.42,450.14 3664.02,593.74 3664.02,675.52 R10.1@3686.26,697.76
NetD3_2: D3.2 D4.2 HOLD.1 MODE.7 MODE.10 MODE.11 Q2.3 | length 6095.3
  Top Layer w10: D3.2 1232.49,130.46 1279.26,177.23 D4.2@1279.26,180.97 ; D4.2 1339.56,124.71 1615.67,124.71 1808.6,317.64 ; Q2.3@1805.54,853.43 1808.6,850.37 1808.6,317.64 ; MODE.7 3408.92,1804.89 ; MODE.10@3233.45,1265.92 3233.45,1243.14 3217.46,1227.15 3217.46,1201.1 3116.4,1100.05 3116.4,1079.05 3126.95,1068.5 3166.18,1068.5 3167.69,1070.01 3206.91,1070.01 3335.12,941.8 3335.12,497.06 3272.65,434.58 2809.85,434.58 2793,451.43 2761.03,451.43 2738.43,428.83 2738.43,383.43 2567.28,212.28 2378.16,212.28 2281.01,115.13 2148.48,115.13 2130.48,133.13 2064.95,133.13 2041.76,156.31 2015.82,156.31 1964.64,105.13 1877.53,105.13 1808.6,174.06 1808.6,317.64 ; MODE.10 3350.64,1368.48 3350.64,1746.61 3408.92,1804.89 ; HOLD.1@3443.03,1839 HOLD.1@3443.03,1843.08 ; HOLD.1@3445.07,1841.04 3408.92,1804.89
NetD4_1: D4.1 R6.2 R7.1 R8.1 | length 1770.2
  Top Layer w10: R7.1 2081.34,489.83 2087.2,483.98 2131.27,483.98 2213.91,566.61 2350.93,566.61 2497.13,420.41 2497.13,372.71 2445.4,320.99 2389.88,320.99 2241.88,172.99 R8.1@2240.12,172.99
  Bottom Layer w10: D4.1@1283.43,484.76 1460.73,484.76 1526.28,550.32 1706.21,550.32 1729.49,527.03 R6.2 ; R6.2@1924.39,529.97 1927.33,527.03 R7.1
NetDS1_1: DS1.1 R9.1 | length 1240.7
  Top Layer w10: DS1.1 2163.98,764.02 2104.45,704.5 2063.86,704.5 2027.7,668.34 2027.7,619.02 2062.58,584.14 2170.19,584.14 2384.38,798.33 2430.17,798.33 2436.03,792.47 R9.1@2436.03,763.77
NetLFO_HIGH_3: LFO_HIGH.3 MANUAL_AUTO.2 MANUAL_AUTO.5 R5.1 R6.1 | length 3357.2
  Top Layer w10: MANUAL_AUTO.5@836.71,448.09 837.74,447.07 MANUAL_AUTO.2 ; LFO_HIGH.3 1825.08,1604.64 1886.6,1543.13 1886.6,995.64 1881.51,990.55 1881.51,510.64 1922.49,469.66 R6.1@1922.49,171.66
  Bottom Layer w10: MANUAL_AUTO.2 904.2,252.11 1841.68,252.11 1918.53,175.26 R6.1@1918.53,174.26 ; R6.1 2025.37,172.7 2064.95,133.13 2273.55,133.13 2293.08,152.66 R5.1@2501.62,152.66
NetLFO_LOW_3: LFO_LOW.3 R1.2 | length 633.4
  Top Layer w10: R1.2 789.18,1511.04 879.61,1601.47 LFO_LOW.3@885.84,1601.47
NetMANUAL_AUTO_6: MANUAL_AUTO.6 R2.2 | length 442.1
  Top Layer w10: R2.2 684.99,658.59 893.6,449.99 938.48,449.99 MANUAL_AUTO.6@940.37,448.09
NetMODE_B: MODE.B PITCH_LOW.2 | length 2210.1
  Top Layer w10: PITCH_LOW.2@884.08,2172.87 891.02,2172.87 1126.22,1937.66 1506.69,1937.66 1562.4,1881.95 2095.58,1881.95 2443.19,1534.35 MODE.B
NetMODE_C: MODE.C PITCH_HIGH.2 | length 1587.7
  Top Layer w10: PITCH_HIGH.2 1831.85,2171.14 2363.57,1639.41 2798.7,1639.41 2882.08,1556.04 2882.08,1385.88 2953.96,1314 MODE.C@2958.05,1314
NetPITCH_HIGH_3: PITCH_HIGH.3 R13.2 | length 2287.7
  Top Layer w10: PITCH_HIGH.3@1827.59,2267.05 1830.3,2267.05 1896.6,2200.76 1896.6,2198.05 2205.03,1889.62 3466.43,1889.62 3493.65,1862.4 3493.65,1801.04 3400.72,1708.11 3400.72,1639.51 R13.2
NetPITCH_LOW_3: PITCH_LOW.3 R12.2 | length 4852.4
  Top Layer w10: PITCH_LOW.3 842.8,2226.05 842.8,2153.11 879.69,2116.22 922.21,2116.22 929.82,2108.61 929.82,2105.19 1115.35,1919.66 1499.23,1919.66 1767.22,1651.67 1767.46,1651.67 1795.46,1679.67 1854.7,1679.67 1896.6,1637.78 1896.6,1598.18 2277.48,1217.3 2346.3,1217.3 2407.22,1156.37 2512.15,1156.37 2573.07,1095.45 2573.07,1052.07 2542.39,1021.39 2446.8,1021.39 2111.91,686.5 2071.31,686.5 2045.7,660.89 2045.7,626.47 2070.04,602.14 2162.74,602.14 2535.99,975.39 2583.51,975.39 2621.14,1013.02 2761.36,1013.02 2959.52,814.86 2959.52,563.35 2987.37,535.5 3012.83,535.5 3038.17,510.16 3231.75,510.16 R12.2@3240.22,518.63
NetQ5_1: Q5.1 R8.2 | length 1312.2
  Top Layer w10: Q5.1 2124.93,810.72 2124.93,802.44 2110.08,787.59 2070.04,787.59 1991.7,709.25 1991.7,519.68 2063.41,447.98 2214.18,447.98 2305.17,356.99 2455.94,356.99 2479.13,380.17 2479.13,412.95 2365.05,527.03 2242.44,527.03 R8.2@2236.74,532.74
NetQ5_2: Q5.2 R9.2 | length 759.9
  Top Layer w10: Q5.2@2102.71,758.48 2092.38,758.48 2009.7,675.8 2009.7,527.13 2070.86,465.98 2370.14,465.98 R9.2
V+: HOLD.4 MODE.5 MODE.6 MODE.A pad.12 Q1.1 Q2.1 Q5.3 R14.1 R15.1 | length 15220.5
  Top Layer w20: Q1.1 1698.68,945.36 1807.23,1053.92 Q2.1@1811.68,1053.92 ; Q2.1@1825.83,1074.16 1825.83,1035.97 1762.05,972.2 1762.05,933.64 1789.32,906.37 1821.05,906.37 1835.97,891.46 1835.97,889.01 1855.14,869.83 1855.14,160.04 1887.05,128.13 1955.11,128.13 1965.66,138.67 1965.66,1496.59 1873.6,1588.66 1873.6,1628.26 1845.18,1656.67 1804.99,1656.67 1776.99,1628.67 1739.36,1628.67 1576.92,1791.11 949.52,1791.11 787.08,1953.55 787.08,2238.94 866.21,2318.07 1296.65,2318.07 1335.6,2279.12 1766.04,2279.12 1776.57,2289.66 ; Q5.3@2087,643.68 2171.75,643.68 2526.46,998.39 2551.92,998.39 2596.07,1042.54 2596.07,1068 2698.44,1170.37 MODE.A@2698.44,1276.97 ; MODE.5@2511.86,1696.7 2506.95,1691.78 2370.34,1691.78 1873.6,2188.52 1873.6,2191.23 1844.48,2220.35 1805.69,2220.35 1776.57,2249.47 1776.57,2289.66 ; MODE.5 2633.36,1804.44 MODE.6@2711.61,1804.44 ; MODE.A@2691.75,1276.97 2627.07,1212.3 2383.83,1212.3 2350.22,1245.9 2350.22,1293.43 2457.15,1400.35 2737.12,1400.35 2887.86,1249.61 2984.74,1249.61 3018.35,1283.22 3018.35,1452.3 2808.23,1662.41 2744.41,1662.41 2667.55,1739.27 2667.55,1755.84 MODE.6 ; R14.1@3476.04,502.75 3606.44,633.15 3606.44,822.1 3630.56,846.22 3630.56,846.47 R15.1 ; R15.1@3731.88,947.94 3785.29,947.94 3848.61,1011.26 3848.61,1398.63 3868.9,1418.92 3868.9,1486.11 3952.52,1569.73 3981.8,1569.73 4013.7,1601.63 4013.7,1640.19 3986.44,1667.45 3704.56,1667.45 HOLD.4 3574.01,1795.07 pad.12 3444.8,2157.13 3366.8,2079.13 3264.65,2079.13 3228.66,2115.11 2635.57,2115.11 2565.66,2185.02 2565.66,2197.2 2370.58,2392.28 2348.38,2392.28 2320.38,2420.28 2285.9,2420.28 2261.52,2395.9 2261.52,2361.42 2418.68,2204.26 2493.55,2204.26 2519.66,2178.15 2519.66,2141.22 2493.55,2115.11 2086.72,2115.11 1883.76,2318.07 1804.99,2318.07 1776.57,2289.66
pads on no net: AUX.1 HOLD.2 HOLD.3 LFO_HIGH.1 LFO_HIGH.4 LFO_HIGH.5 LFO_LOW.1 LFO_LOW.4 LFO_LOW.5 MANUAL_AUTO.1 MANUAL_AUTO.3 MODE.1 MODE.2 MODE.4 PITCH_HIGH.1 PITCH_HIGH.4 PITCH_HIGH.5 PITCH_LOW.1 PITCH_LOW.4 PITCH_LOW.5

## Polygon pours and split planes (outlines as drawn)
GND on Bottom Layer "GND_L02_P012" (solid, pour order 12): 0,2600 4500,2600 4500,0 0,0

## Silkscreen, mask and mechanical layers (free items; w line width, h text height)
Top Overlay:
  text "GND" at 3216.88,2242.97 h60
  text "V+" at 3527.88,2239.57 h60

## Text inside footprints (layer, text, board x,y; h text height)
C3: Top Overlay "+" at 1442.77,482.71 h59.06
C4: Top Overlay "+" at 1442.46,170.29 h59.06
C5: Top Overlay "+" at 2583.79,383.83 h59.06